# EAGLE board motorcontroller (EAGLE 8.5.0)
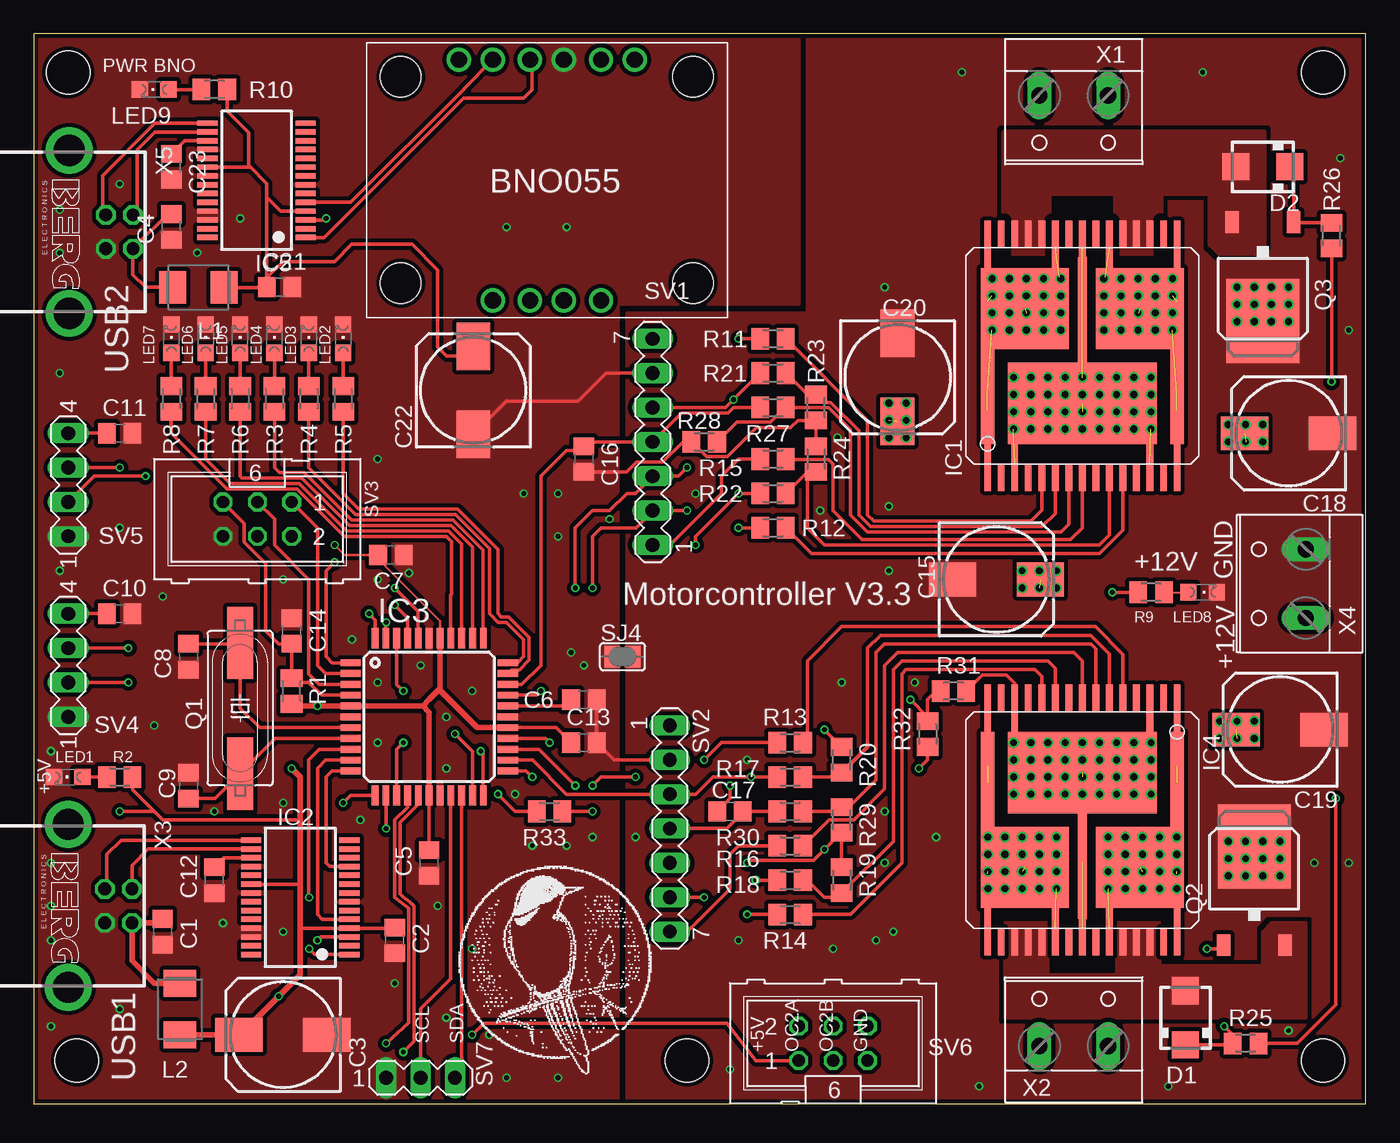
[diagram p0: board, top side]
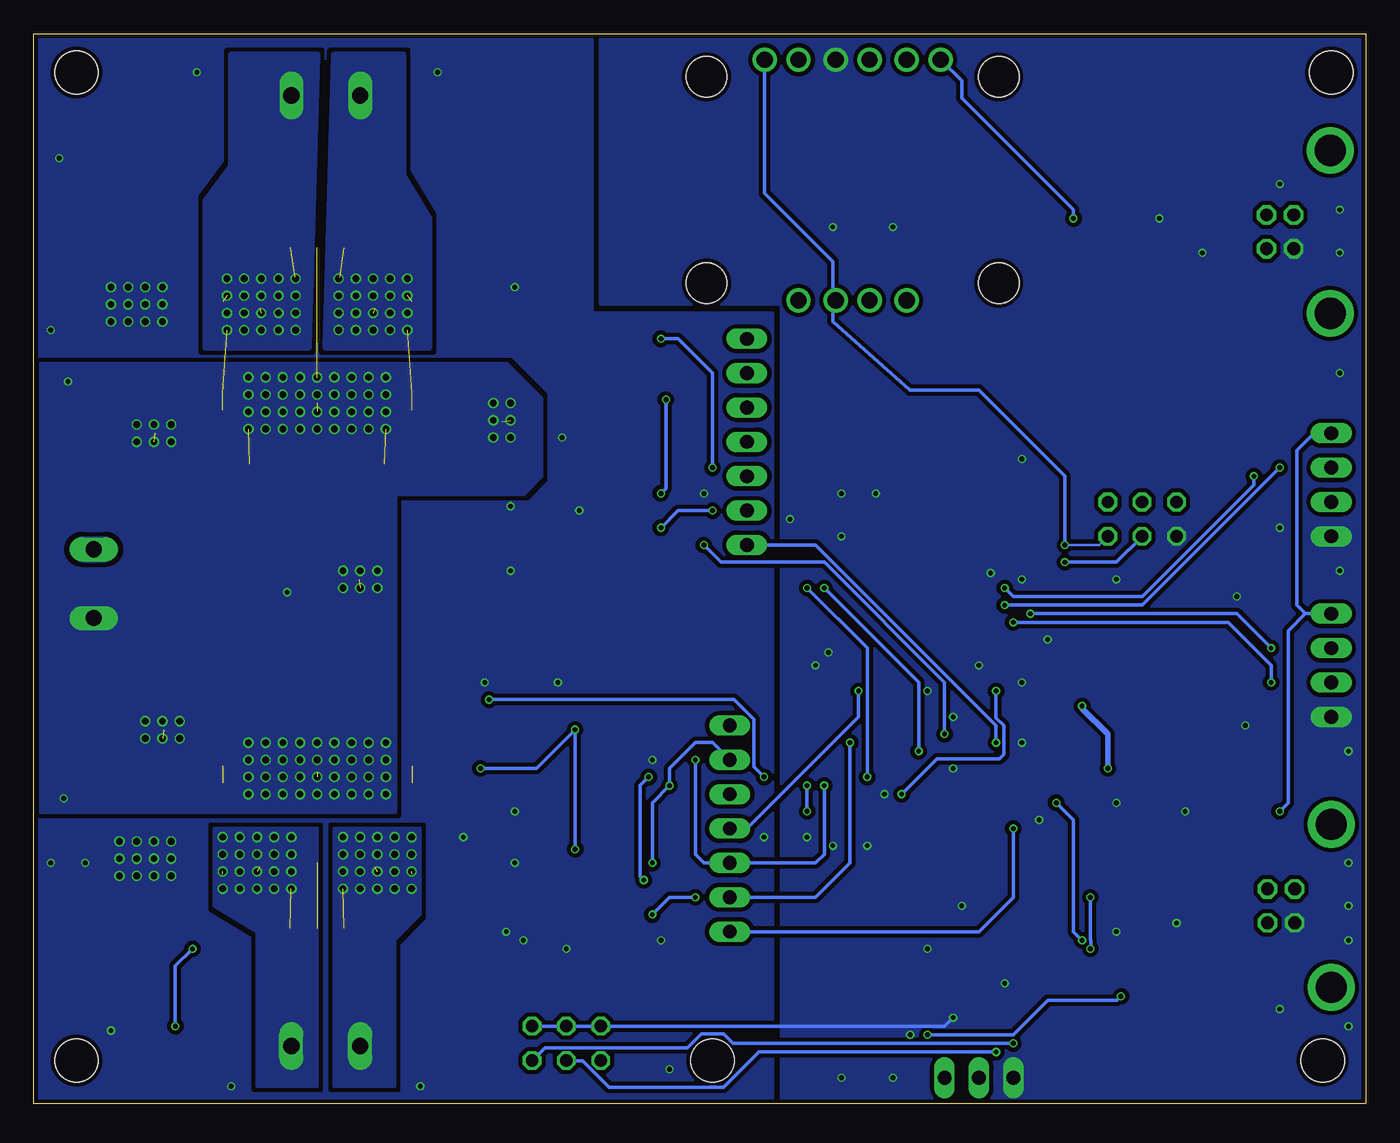
[diagram p1: board, bottom side, seen from below]

Size 98.41 x 79.05 mm. Coordinates in mm from the lower left corner, seen from the top.
Outline: 0,0 98.41,0 98.41,79.05 0,79.05 0,0
Copper layers (1*16): Top 0.018mm / dielectric 1.55mm / Bottom 0.018mm
Design rules "eC_2Layer_PClass6_BaseCopperO18_eCDefault": minimum track width 0.15mm, minimum drill 0.35mm, track to track 0.15mm, track to pad 0.15mm, pad to pad 0.15mm, via to via 0.15mm, smd to smd 0mil, copper to edge 0.25mm, drill to drill 0.35mm, minimum pad ring 0.175mm, minimum via ring 0.125mm, stop-mask expansion 0mil, vias tented up to drill 0.45mm, thermal gap 0.2mm
Holes 3.2 mm at 3.17,3.17 95.25,3.17 48.26,3.17 2.54,76.2 95.25,76.2

## Footprints (pad centres in the part's own frame; a part is rotated, then mirrored left to right if it is on the bottom)
C0805 = smd 1.3 x 1.5: 1 -0.95,0; 2 0.95,0
153CLV-0810 = smd 3.5 x 2.5: + 3.25,0; - -3.25,0
SMA = smd 2 x 2: A 2,0; C -2,0
MULTIPOWERSO-30 = smd 0.508 x 12: 1 -7,-4; 15 7,-4; 16 7,4; 30 -7,4 | smd 0.508 x 2: 2 -6,-9; 4 -4,-9; 5 -3,-9; 6 -2,-9; 7 -1,-9; 8 0,-9; 9 1,-9; 10 2,-9; 11 3,-9; 12 4,-9; 14 6,-9; 17 6,9; 18 5,9; 19 4,9; 20 3,9; 22 1,9; 24 -1,9; 26 -3,9; 27 -4,9; 28 -5,9; 29 -6,9 | smd 0.508 x 4: 3 -5,-8; 13 5,-8; 21 2,8; 23 0,8; 25 -2,8 | smd 6.5 x 6: OUTA -4.25,3.5; OUTB 4.25,3.5 | smd 1 x 7.5: OUTA@1 -7,-2.755; OUTB@1 7,-2.755 | smd 11 x 6: VCC 0,-3.5 | smd 0.65 x 8.3: VCC@1 0,3.145
SSOP28 = smd 0.4 x 1.5: 1 -4.225,-3.625; 2 -3.575,-3.625; 3 -2.925,-3.625; 4 -2.275,-3.625; 5 -1.625,-3.625; 6 -0.975,-3.625; 7 -0.325,-3.625; 8 0.325,-3.625; 9 0.975,-3.625; 10 1.625,-3.625; 11 2.275,-3.625; 12 2.925,-3.625; 13 3.575,-3.625; 14 4.225,-3.625; 15 4.225,3.625; 16 3.575,3.625; 17 2.925,3.625; 18 2.275,3.625; 19 1.625,3.625; 20 0.975,3.625; 21 0.325,3.625; 22 -0.325,3.625; 23 -0.975,3.625; 24 -1.625,3.625; 25 -2.275,3.625; 26 -2.925,3.625; 27 -3.575,3.625; 28 -4.225,3.625
TQFP44 = smd 1.5 x 0.5: 1 -5.8,4; 2 -5.8,3.2; 3 -5.8,2.4; 4 -5.8,1.6; 5 -5.8,0.8; 6 -5.8,0; 7 -5.8,-0.8; 8 -5.8,-1.6; 9 -5.8,-2.4; 10 -5.8,-3.2; 11 -5.8,-4; 23 5.8,-4; 24 5.8,-3.2; 25 5.8,-2.4; 26 5.8,-1.6; 27 5.8,-0.8; 28 5.8,0; 29 5.8,0.8; 30 5.8,1.6; 31 5.8,2.4; 32 5.8,3.2; 33 5.8,4 | smd 0.5 x 1.5: 12 -4,-5.8; 13 -3.2,-5.8; 14 -2.4,-5.8; 15 -1.6,-5.8; 16 -0.8,-5.8; 17 0,-5.8; 18 0.8,-5.8; 19 1.6,-5.8; 20 2.4,-5.8; 21 3.2,-5.8; 22 4,-5.8; 34 4,5.8; 35 3.2,5.8; 36 2.4,5.8; 37 1.6,5.8; 38 0.8,5.8; 39 0,5.8; 40 -0.8,5.8; 41 -1.6,5.8; 42 -2.4,5.8; 43 -3.2,5.8; 44 -4,5.8
L4532M = smd 2 x 2.4: 1 -1.9,0; 2 1.9,0
CHIPLED_0805 = smd 1.2 x 1.2: A 0,-1.05; C 0,1.05
HC49UP = smd 5.334 x 1.93: 1 -4.826,0; 2 4.826,0
D-PAK_TO252AA = smd 1 x 1.6: 1 -2.28,-4.8; 3 2.28,-4.8 | smd 5.4 x 6.2: 4 0,2.5
M0805 = smd 1.3 x 1.6: 1 -0.95,0; 2 0.95,0
SJ = smd 1.168 x 1.6: 1 -0.762,0; 2 0.762,0
MA07-1 = drill 1.016 long: 1 -7.62,0; 2 -5.08,0; 3 -2.54,0; 4 0,0; 5 2.54,0; 6 5.08,0; 7 7.62,0
ML6 = drill 0.914 octagon: 1 -2.54,-1.27; 2 -2.54,1.27; 3 0,-1.27; 4 0,1.27; 5 2.54,-1.27; 6 2.54,1.27
MA04-1 = drill 1.016 long: 1 -3.81,0; 2 -1.27,0; 3 1.27,0; 4 3.81,0
MA03-1 = drill 1.016 long: 1 -2.54,0; 2 0,0; 3 2.54,0
BNO055_ADA = drill 1.2: P$1 -6.5,-8.89; P$2 -4,-8.89; P$3 -1.25,-8.89; P$4 1.25,-8.89; P$5 4,-8.89; P$6 6.5,-8.89; P$7 -4,8.89; P$8 -1.25,8.89; P$9 1.25,8.89; P$10 4,8.89 | hole 3: -10.795,7.62; -10.795,-7.62; 10.795,-7.62; 10.795,7.62
W237-132 = drill 1.194 long: 1 -2.54,-0.635; 2 2.54,-0.635
PN61729-S = drill 0.95 octagon: 1 1.25,4.71; 2 -1.25,4.71; 3 -1.25,2.71; 4 1.25,2.71 | drill 2.3 pad 2.9: S1 -6.02,0; S2 6.02,0

## Placement (x,y rotation side)
C1  [C0805]  9.53,12.7 90 top
C2  100nF  [C0805]  26.67,12.06 270 top
C3  [153CLV-0810]  18.41,5.08 180 top
C4  [C0805]  10.16,64.77 90 top
C5  100nF  [C0805]  29.21,17.78 270 top
C6  100nF  [C0805]  40.64,29.84 0 top
C7  100nF  [C0805]  26.39,40.54 0 top
C8  27pF  [C0805]  11.43,33.02 270 top
C9  27pF  [C0805]  11.43,23.5 90 top
C10  100nF  [C0805]  6.35,36.2 0 top
C11  100nF  [C0805]  6.35,49.53 0 top
C12  100nF  [C0805]  13.34,16.51 270 top
C13  100nF  [C0805]  40.64,26.67 0 top
C14  100nF  [C0805]  19.05,34.92 90 top
C15  [153CLV-0810]  71.12,38.73 0 top
C16  33nF  [C0805]  40.64,47.62 270 top
C17  33nF  [C0805]  51.44,21.59 180 top
C18  [153CLV-0810]  92.71,49.53 180 top
C19  [153CLV-0810]  92.08,27.62 180 top
C20  [153CLV-0810]  63.82,53.66 270 top
C21  100nF  [C0805]  18.17,60.33 0 top
C22  [153CLV-0810]  32.47,52.7 90 top
C23  100nF  [C0805]  10.16,69.22 270 top
D1  DO214AC  [SMA]  85.09,6.35 90 top
D2  DO214AC  [SMA]  90.81,69.22 180 top
IC1  VNH3SP30  [MULTIPOWERSO-30]  77.47,55.24 0 top
IC2  FT232RL  [SSOP28]  19.68,15.24 90 top
IC3  ATMEGA644A  [TQFP44]  29.21,28.57 0 top
IC4  VNH3SP30  [MULTIPOWERSO-30]  77.47,20.95 180 top
IC5  FT232RL  [SSOP28]  16.46,68.22 90 top
L1  [L4532M]  12.17,60.3 180 top
L2  [L4532M]  10.79,6.99 90 top
LED1  [CHIPLED_0805]  2.54,24.13 90 top
LED2  [CHIPLED_0805]  22.86,56.52 0 top
LED3  [CHIPLED_0805]  20.32,56.52 0 top
LED4  [CHIPLED_0805]  17.78,56.52 0 top
LED5  [CHIPLED_0805]  15.24,56.52 0 top
LED6  [CHIPLED_0805]  12.7,56.52 0 top
LED7  [CHIPLED_0805]  10.16,56.52 0 top
LED8  [CHIPLED_0805]  86.36,37.78 270 top
LED9  [CHIPLED_0805]  8.89,74.93 90 top
Q1  [HC49UP]  15.24,29.21 90 top
Q2  IRLR 2905  [D-PAK_TO252AA]  90.17,16.51 0 top
Q3  IRLR2905  [D-PAK_TO252AA]  90.81,60.33 180 top
R1  [M0805]  19.05,30.48 270 top
R2  [M0805]  6.35,24.13 180 top
R3  [M0805]  17.78,52.07 90 top
R4  [M0805]  20.32,52.07 90 top
R5  [M0805]  22.86,52.07 90 top
R6  [M0805]  15.24,52.07 90 top
R7  [M0805]  12.7,52.07 90 top
R8  [M0805]  10.16,52.07 90 top
R9  [M0805]  82.55,37.78 0 top
R10  [M0805]  13.34,74.93 0 top
R11  [M0805]  54.61,56.52 180 top
R12  [M0805]  54.61,42.55 180 top
R13  [M0805]  55.88,26.67 180 top
R14  [M0805]  55.88,13.97 180 top
R15  [M0805]  54.61,47.62 180 top
R16  [M0805]  55.88,19.05 180 top
R17  [M0805]  55.88,24.13 180 top
R18  [M0805]  55.88,16.51 180 top
R19  [M0805]  59.69,16.51 90 top
R20  [M0805]  59.69,25.4 270 top
R21  [M0805]  54.61,53.98 180 top
R22  [M0805]  54.61,45.09 180 top
R23  [M0805]  57.78,51.44 270 top
R24  [M0805]  57.78,47.62 90 top
R25  [M0805]  89.53,4.45 0 top
R26  [M0805]  95.89,64.14 270 top
R27  10k  [M0805]  54.61,51.44 180 top
R28  1,5k  [M0805]  49.53,48.9 180 top
R29  [M0805]  59.69,20.95 270 top
R30  10k  [M0805]  55.88,21.59 180 top
R31  [M0805]  67.94,30.48 0 top
R32  [M0805]  66.04,27.3 90 top
R33  [M0805]  38.1,21.59 180 top
SJ4  [SJ]  43.5,33.02 0 top
SV1  [MA07-1]  45.72,48.9 90 top
SV2  [MA07-1]  46.99,20.32 270 top
SV3  [ML6]  16.51,43.18 180 top
SV4  [MA04-1]  2.54,32.38 90 top
SV5  [MA04-1]  2.54,45.72 90 top
SV6  [ML6]  59.05,4.45 0 top
SV7  [MA03-1]  28.57,1.91 0 top
U$1  BNO055  [BNO055_ADA]  37.91,68.24 180 top
X1  [W237-132]  76.83,73.86 180 top
X2  [W237-132]  76.83,4.88 0 top
X3  PN61729-S  [PN61729-S]  2.54,14.61 270 top
X4  [W237-132]  93.34,38.42 90 top
X5  PN61729-S  [PN61729-S]  2.61,64.41 270 top

## Library data of the parts
C1-C23 R1-R33 = rcl
D1 D2 = diode
IC1 IC4 = st-microelectronics
IC2 IC5 = ftdichip; MPN: FT232RL; OC_FARNELL: 1146032; OC_NEWARK: 91K9918
IC3 = atmel; MPN: ATMEGA644PV-10AU; OC_FARNELL: 1455123; OC_NEWARK: 58M3748
L1 L2 = eagle-ltspice; SPICEMODEL: NONE; SPICEPREFIX: L
LED1-LED9 = led
Q1 = crystal; OC_FARNELL: unknown; OC_NEWARK: unknown
Q2 Q3 = transistor-power
SJ4 = jumper
SV1 SV2 SV4 SV5 SV7 = con-lstb; OC_FARNELL: unknown; OC_NEWARK: unknown
SV3 SV6 = con-harting-ml; OC_FARNELL: unknown; OC_NEWARK: unknown
U$1 = bno055_adafruit
X1 X2 X4 = con-wago-508; OC_FARNELL: unknown; OC_NEWARK: unknown
X3 X5 = con-berg; OC_FARNELL: unknown; OC_NEWARK: unknown

## Nets
+5V: C2.1 C3.+ C5.1 C7.1 C10.1 C11.1 C13.1 IC2.4 IC2.20 IC3.5 IC3.17 IC3.27 IC3.38 L2.1 R1.2 R2.1 SV3.2 SV4.4 SV5.4 SV6.1 U$1.P$1 U$1.P$8
+12V: C15.+ C18.+ C19.+ C20.+ IC1.3 IC1.13 IC1.23 IC1.VCC IC1.VCC@1 IC4.3 IC4.13 IC4.23 IC4.VCC IC4.VCC@1 R9.1 R25.2 R26.2 R31.2 X4.1
A_1: IC3.44 SV4.3
A_2: IC3.41 SV5.3
B_1: IC3.43 SV4.2
B_2: IC3.40 SV5.2
CS_1: C16.1 IC3.31 R27.2 SV1.4
CS_2: C17.1 IC3.30 R30.2 SV2.4
CTS: IC2.11 IC3.11
EN_1: IC3.21 R21.2 R22.2 SV1.5
EN_2: IC3.24 R17.2 R18.2 SV2.3
GND: C1.1 C2.2 C3.- C4.1 C5.2 C6.2 C7.2 C8.2 C9.2 C10.2 C11.2 C12.2 C13.2 C14.2 C16.2 C17.2 C21.2 C22.- C23.2 IC2.7 IC2.18 IC2.21 IC2.25 IC2.26 IC3.6 IC3.18 IC3.28 IC3.39 IC5.7 IC5.18 IC5.21 IC5.25 IC5.26 LED1.C LED2.C LED3.C LED4.C LED5.C LED6.C LED7.C LED9.C R19.2 R20.1 R23.2 R24.2 R28.2 R29.2 R32.1 SJ4.1 SV1.6 SV2.2 SV3.6 SV4.1 SV5.1 SV6.2 SV6.4 SV6.6 SV7.1 U$1.P$3 X3.4 X5.4
GNDA: C15.- C18.- C19.- C20.- LED8.C Q2.4 Q3.4 SJ4.2 X4.2
INA_1: IC3.22 R11.2 SV1.3
INA_2: IC3.25 R13.2 SV2.5
INB_1: IC3.23 R12.2 SV1.2
INB_2: IC3.26 R14.2 SV2.6
LED2: IC3.32 R5.1
LED3: IC3.33 R4.1
LED4: IC3.34 R3.1
LED5: IC3.35 R6.1
LED6: IC3.36 R7.1
LED7: IC3.37 R8.1
MISO: IC3.2 SV3.1
MOSI: IC3.1 SV3.4
N$1: SV1.7
N$2: LED1.A R2.2
N$3: IC2.16 X3.2
N$4: IC2.15 X3.3
N$5: LED4.A R3.2
N$6: LED3.A R4.2
N$7: C8.1 IC3.7 Q1.2
N$8: C9.1 IC3.8 Q1.1
N$9: LED2.A R5.2
N$10: C6.1 IC3.29
N$11: LED5.A R6.2
N$12: LED6.A R7.2
N$13: LED7.A R8.2
N$14: C1.2 L2.2 X3.1
N$15: LED8.A R9.2
N$16: LED9.A R10.1
N$17: C12.1 IC2.17
N$18: IC4.5 R13.1
N$19: IC5.16 X5.2
N$20: IC4.11 R14.1
N$21: IC4.8 R16.1
N$22: IC1.5 R11.1
N$23: IC1.11 R12.1
N$24: IC1.8 R15.1
N$25: IC4.6 R17.1 R20.2
N$26: IC4.10 R18.1 R19.1
N$27: D2.A IC1.18 IC1.19 IC1.20 IC1.26 IC1.27 IC1.28 Q3.3
N$28: IC1.6 R21.1 R23.1
N$29: IC1.10 R22.1 R24.1
N$30: D1.A IC4.18 IC4.19 IC4.20 IC4.26 IC4.27 IC4.28 Q2.3
N$31: D1.C Q2.1 R25.1
N$32: D2.C Q3.1 R26.1
N$33: IC4.1 IC4.25 IC4.30 IC4.OUTA IC4.OUTA@1 X2.2
N$34: IC4.15 IC4.16 IC4.21 IC4.OUTB IC4.OUTB@1 X2.1
N$35: IC1.15 IC1.16 IC1.21 IC1.OUTB IC1.OUTB@1 X1.1
N$36: IC1.1 IC1.25 IC1.30 IC1.OUTA IC1.OUTA@1 X1.2
N$37: IC1.7 R27.1 R28.1
N$38: IC4.7 R29.1 R30.1
N$39: IC5.15 X5.3
N$40: C4.2 L1.2 X5.1
N$41: C23.1 IC5.17
N$42: C21.1 C22.+ IC5.4 IC5.20 L1.1 R10.2
N$43: IC3.16 SV6.3
N$44: IC3.15 SV6.5
N$45: R31.1 R32.2 R33.1
N$46: IC3.42 R33.2
PWM_1: IC3.14 R15.2 SV1.1
PWM_2: IC3.13 R16.2 SV2.7
RESET: C14.1 IC3.4 R1.1 SV3.5
RST: IC5.3 U$1.P$6
RTS: IC2.3 IC3.12
RX: IC2.1 IC3.9
RX_1: IC5.1 U$1.P$4
SCK: IC3.3 SV3.3
SCL: IC3.19 SV7.2
SDA: IC3.20 SV7.3
TX: IC2.5 IC3.10
TX_1: IC5.5 U$1.P$5

## Tracks (layer width: path | path; a pad name or v marks a point on that pad's centre or on a via)
+5V  (via drill 0.35)
  Top 0.2: 25.67,40.01 25.67,39.9 | 25.67,40.01 25.67,40.31 C7.1 22.96,40.54 v22.23,41.27 | 25.67,40.01 30.01,35.67 IC3.38
  Top 0.254: 19.68,13 19.72,12.96 IC2.4 26.62,12.96 C2.1 | IC2.20 19.65,16.21 19.68,16.25 | R2.1 7.3,23.18 8.89,21.59 | 8.89,21.59 9.53,20.95 19.59,20.95 19.68,20.86 | 19.2,29.38 R1.2 | IC3.27 38.59,27.77 C13.1 | C5.1 IC3.17 | SV5.4 C11.1 | C10.1 SV4.4 | v6.35,21.59 8.89,21.59 | 29.95,30.58 30.01,30.64 | 29.21,29.85 29.21,29.84 | 28.75,29.38 28.74,29.38 | SV6.1 53.34,3.17 51.2,5.95 33.25,5.95 v32.38,5.08
  Top 0.406: L2.1 C3.+ 15.24,5.08 v18.08,7.92 19.68,9.53 19.68,13 19.68,16.25 19.68,20.86 19.68,24.13 v19.05,24.77 | 19.2,29.38 v20.95,29.38 IC3.5 28.74,29.38 | 30.01,30.64 IC3.38 | IC3.27 32.76,27.77 29.95,30.58 29.21,29.85 28.75,29.38 29.21,28.91 IC3.17
  Bottom 0.2: v22.23,41.27 19.68,41.27 SV3.2
  Bottom 0.254: 4.45,36.2 SV4.4 | 4.45,36.2 5.71,34.92 5.71,22.23 v6.35,21.59 | SV5.4 3.81,49.53 5.08,48.26 5.08,36.83 4.45,36.2 | v22.23,41.27 22.23,46.35 28.57,52.7 33.66,52.7 39.37,57.78 39.37,59.14 39.32,59.19 | 39.32,59.19 U$1.P$8 | U$1.P$1 44.41,67.27 39.37,62.23 39.37,59.23 39.32,59.19 | v32.38,5.08 26.04,5.08 23.5,7.62 18.39,7.62 v18.08,7.92
  Bottom 0.406: v19.05,24.77 19.05,27.3 20.95,29.21 v20.95,29.38
+12V  (via drill 0.35, 0.5)  (11 unrouted)
  Top 0.152: IC4.3 82.47,26.75 v82.55,26.67 | IC4.13 72.47,26.75 v72.39,26.67 | IC4.23 v77.47,22.86
  Top 0.254: v79.69,37.78 R9.1 | R25.2 93.34,4.45 96.2,7.3 v96.2,22.54 | R26.2 v95.89,53.34 | IC4.13 72.47,31.04 71.84,31.66 70.08,31.66 R31.2
  other vias: 82.55,25.4 82.55,24.13 82.55,22.86 77.47,26.67 77.47,25.4 77.47,24.13 81.28,26.67 81.28,25.4 81.28,24.13 81.28,22.86 80.01,26.67 80.01,25.4 80.01,24.13 80.01,22.86 78.74,26.67 78.74,25.4 78.74,24.13 78.74,22.86 76.2,26.67 76.2,25.4 76.2,24.13 76.2,22.86 74.93,26.67 74.93,25.4 74.93,24.13 74.93,22.86 73.66,26.67 73.66,25.4 73.66,24.13 73.66,22.86 72.39,25.4 72.39,24.13 72.39,22.86 90.17,28.26 88.9,28.26 87.63,28.26 87.63,26.99 88.9,26.99 90.17,26.99 75.56,39.37 74.3,39.37 73.03,39.37 73.03,38.1 74.3,38.1 75.56,38.1 82.55,53.66 82.55,52.39 82.55,51.12 82.55,49.85 77.47,53.66 77.47,52.39 77.47,51.12 77.47,49.85 81.28,53.66 81.28,52.39 81.28,51.12 81.28,49.85 80.01,53.66 80.01,52.39 80.01,51.12 80.01,49.85 78.74,53.66 78.74,52.39 78.74,51.12 78.74,49.85 76.2,53.66 76.2,52.39 76.2,51.12 76.2,49.85 74.93,53.66 74.93,52.39 74.93,51.12 74.93,49.85 73.66,53.66 73.66,52.39 73.66,51.12 73.66,49.85 72.39,53.66 72.39,52.39 72.39,51.12 72.39,49.85 63.18,51.75 63.18,50.48 63.18,49.21 64.45,49.21 64.45,50.48 64.45,51.75 90.81,50.16 89.53,50.16 88.27,50.16 88.27,48.9 89.53,48.9 90.81,48.9
  pour Bottom (isolate 0.406, no thermals): 99.06,54.61 63.5,54.61 60.96,52.07 60.96,46.35 62.23,45.09 71.75,45.09 71.75,21.59 99.06,21.59
A_1  (via drill 0.35)
  Top 0.254: IC3.44 25.21,35.75 v24.77,36.2 | v6.99,33.66 SV4.3
  Bottom 0.254: v24.77,36.2 9.53,36.2 v6.99,33.66
A_2  (via drill 0.35)
  Top 0.254: IC3.41 27.61,35.89 v26.67,36.83 | v6.35,46.99 SV5.3
  Bottom 0.254: v26.67,36.83 16.51,36.83 v6.35,46.99
B_1  (via drill 0.35)
  Top 0.254: IC3.43 26.01,35.53 v26.04,35.56 | v6.99,31.11 SV4.2
  Bottom 0.254: v26.04,35.56 10.16,35.56 6.99,32.38 v6.99,31.11
B_2  (via drill 0.35)
  Top 0.254: IC3.40 28.41,36.36 v26.67,38.1 | v8.26,46.35 4.45,46.35 SV5.2
  Bottom 0.254: v26.67,38.1 26.04,37.47 16.51,37.47 8.26,45.72 v8.26,46.35
CS_1
  Top 0.254: IC3.31 36.05,30.98 37.47,32.38 37.47,46.35 39.37,48.26 40.33,48.26 C16.1 40.96,48.9 SV1.4 47.86,51.03 51.29,51.03 51.69,51.44 R27.2
CS_2  (via drill 0.35)
  Top 0.254: 52.49,21.59 R30.2 | 52.49,21.59 C17.1 | SV2.4 51.23,20.32 52.49,21.59 | IC3.30 37.16,30.18 v37.47,30.48
  Bottom 0.254: v37.47,30.48 37.47,28.57 45.72,20.32 SV2.4
CTS
  Top 0.254: IC3.11 22.04,24.57 21.59,24.13 21.59,18.59 | 21.59,18.59 21.59,18.41 | IC2.11 21.86,17.52 21.59,17.78 21.59,18.59
EN_1  (via drill 0.35)
  Top 0.254: SV1.5 51.12,51.44 v51.7,52.02 R21.2 | R22.2 v52.07,45.09 48.9,41.91 v48.9,41.27 | IC3.21 32.41,26.01 v31.11,27.3
  Bottom 0.254: v51.7,52.02 51.7,45.45 v52.07,45.09 | v31.11,27.3 31.11,31.11 40.01,40.01 47.62,40.01 v48.9,41.27
EN_2  (via drill 0.35)
  Top 0.254: R17.2 v52.98,24.13 50.16,24.13 48.9,22.86 SV2.3 39.37,22.86 36.85,25.38 IC3.24 | v53.34,16.51 R18.2
  Bottom 0.254: v53.34,16.51 53.62,16.79 53.62,23.5 v52.98,24.13
GND  (via drill 0.35)
  Top 0.254: R24.2 R23.2 56.45,50.48 55.92,49.95 53.38,49.95 51.24,47.82 49.72,47.82 48.64,48.9 R28.2 47.95,48.9 46.45,47.39 44.53,47.39 43.81,46.67 C16.2 | R19.2 R29.2 59.63,20 v58.41,18.79 57.59,17.97 52.9,17.97 v52.7,17.78 | v51.44,23.5 51.44,22.54 C17.2 | SV2.2 42.86,25.4 C13.2 C6.2 | v58.42,27.62 59.05,26.99 R20.1 | SV1.6 42.26,53.98 40.2,51.92 34.94,51.92 C22.- | R32.1 66.04,25.4 v65.41,24.77
  Bottom 0.254: v52.7,17.78 52.7,22.23 v51.44,23.5 51.44,24.77 49.53,26.67 48.26,26.67 SV2.2 | v58.41,18.79 58.41,26.98 v58.42,27.62 61.28,24.77 v65.41,24.77 | SV6.6 SV6.4 SV6.2 31.11,5.71 v30.48,6.35
  other vias: 18.41,12.7 13.97,13.34 6.35,6.99 8.89,27.94 25.4,26.67 25.4,31.11 30.48,28.57 40.64,32.38 39.69,33.34 38.73,41.91 38.73,45.09 36.2,45.09 27.71,39.2 25.4,38.73 25.4,47.62 6.35,42.55 9.53,37.47 18.41,38.73 23.5,34.29 35.56,22.86 26.67,8.89 29.84,14.61 24.13,20.95 39.37,19.05 18.41,22.23 13.34,21.59 34.92,64.77 39.37,64.77 12.06,62.87 15.24,65.41 6.35,67.94 32.38,11.43 28.57,32.38 41.27,19.68 36.83,19.05 30.48,24.77 42.55,43.18 32.38,30.48 34.92,1.91 38.73,1.91 33.66,5.08 1.91,66.04 1.91,62.87 1.91,53.98 1.91,39.37 1.27,26.04 1.27,17.78 1.27,14.61 1.27,12.06 1.27,5.71
  pour Top (isolate 0.305, no thermals): -0.64,92.71 56.52,92.71 56.52,59.05 43.18,59.05 43.18,-0.64 -0.55,-0.71 -0.64,57.78
  pour Bottom (isolate 0.305, no thermals): -0.64,92.71 56.52,92.71 56.52,59.05 43.18,59.05 43.18,-1.27 -0.57,-1.39 -0.64,58.42
GNDA  (via drill 0.35, 0.5)
  other vias: 88.27,19.37 88.27,18.1 88.27,16.83 48.9,45.09 89.53,19.37 89.53,18.1 89.53,16.83 90.81,19.37 90.81,18.1 90.81,16.83 92.08,19.37 92.08,18.1 92.08,16.83 59.69,31.11 66.67,19.68 63.18,44.13 62.87,60.33 97.16,57.15 96.52,69.85 97.16,17.78 94.61,17.78 83.82,1.27 69.85,1.27 68.58,76.2 86.36,76.2 63.18,39.37 92.71,5.4 88.9,60.33 88.9,59.05 88.9,57.78 90.17,60.33 90.17,59.05 90.17,57.78 91.44,60.33 91.44,59.05 91.44,57.78 92.71,60.33 92.71,59.05 92.71,57.78 63.5,12.7 52.07,12.06 51.44,2.54 62.23,12.06 59.05,11.43 65.09,31.11 62.87,21.59 62.87,17.78 52.7,25.4 58.1,43.81 59.37,49.21 44.45,19.68
  pour Bottom (isolate 0.305, rank 4, no thermals): 57.15,92.71 100.33,92.71 100.33,57.15 99.69,-1.27 43.81,-1.27 43.81,58.42 57.15,58.42
  pour Top (isolate 0.305, rank 4, no thermals): 57.15,92.71 100.33,92.71 100.33,-1.91 43.81,-1.91 43.81,58.42 57.15,58.42
INA_1  (via drill 0.35)
  Top 0.254: v48.26,46.99 47.62,46.35 SV1.3 44.45,45.09 43.81,45.09 42.55,43.81 41.27,43.81 40.01,42.55 v40.01,38.1 | R11.2 v52.07,56.52 | IC3.22 33.21,25.84 v33.02,26.04
  Bottom 0.254: v48.26,46.99 48.26,53.98 50.8,56.52 v52.07,56.52 | v33.02,26.04 33.02,31.11 v40.01,38.1
INA_2  (via drill 0.35)
  Top 0.254: R13.2 50.8,26.67 v49.53,25.4 | IC3.25 37.33,26.18 v40.01,23.5
  Bottom 0.254: v49.53,25.4 49.53,18.41 48.9,17.78 47.03,17.78 SV2.5 40.64,17.78 40.01,18.41 v40.01,23.5
INB_1  (via drill 0.35)
  Top 0.254: 45.77,43.81 SV1.2 | 45.77,43.81 v48.26,43.81 | R12.2 v52.07,42.55 | IC3.23 36.38,24.57 v36.83,24.13 | v41.27,38.1 41.27,41.91 41.91,42.55 44.5,42.55 45.77,43.81
  Bottom 0.254: v48.26,43.81 50.8,43.81 v52.07,42.55 | v36.83,24.13 36.83,33.66 v41.27,38.1
INB_2  (via drill 0.35)
  Top 0.254: SV2.6 v49.53,15.24 | R14.2 v52.7,13.97 | IC3.26 37.8,26.98 v38.1,26.67
  Bottom 0.254: v49.53,15.24 51.44,15.24 v52.7,13.97 | v38.1,26.67 38.1,17.78 40.64,15.24 SV2.6
LED2
  Top 0.254: IC3.32 35.28,32.05 35.88,32.05 36.6,32.77 36.6,34.46 35.09,35.96 34.52,35.96 34.29,36.2 34.29,40.96 31.32,43.93 24.02,43.93 22.86,45.09 R5.1
LED3
  Top 0.254: IC3.33 35.75,32.58 36.2,33.02 36.2,34.29 34.92,35.56 34.29,35.56 33.66,36.2 33.66,41.02 31.15,43.53 23.78,43.53 20.32,46.99 R4.1
LED4
  Top 0.254: IC3.34 33.21,40.89 30.98,43.12 23.49,43.12 19.99,46.62 18.14,46.62 17.78,46.99 R3.1
LED5
  Top 0.254: IC3.35 32.41,41.12 30.82,42.72 23.32,42.72 20.95,45.09 20.92,45.09 19.78,46.22 15.37,46.22 15.24,46.35 R6.1
LED6
  Top 0.254: IC3.36 31.61,41.35 30.65,42.31 23.12,42.31 19.62,45.82 14.51,45.82 12.7,47.62 R7.1
LED7
  Top 0.254: IC3.37 30.81,37.59 30.87,37.66 30.87,41.52 30.48,41.91 22.95,41.91 19.45,45.41 14.28,45.41 10.16,49.53 R8.1
MISO
  Top 0.254: IC3.2 21.57,31.77 20.95,32.38 20.95,42.55 SV3.1
MOSI  (via drill 0.35)
  Top 0.254: IC3.1 22.04,32.58 21.59,33.02 21.59,39.37 v22.23,40.01
  Bottom 0.254: v22.23,40.01 18.41,40.01 SV3.4
N$2
  Top 0.254: R2.2 LED1.A
N$3
  Top 0.254: IC2.16 8.46,18.82 7.25,17.6 X3.2
N$4
  Top 0.254: IC2.15 6.45,19.46 5.4,18.41 5.4,16 X3.3
N$5
  Top 0.254: LED4.A R3.2
N$6
  Top 0.254: LED3.A R4.2
N$7
  Top 0.254: 15.17,33.97 C8.1 | 15.17,33.97 Q1.2 | IC3.7 16.68,27.77 15.24,29.21 15.24,33.9 15.17,33.97
N$8
  Top 0.254: C9.1 13.4,22.55 15.09,24.24 | 15.09,24.24 Q1.1 | IC3.8 17.83,26.98 15.09,24.24
N$9
  Top 0.254: LED2.A R5.2
N$10
  Top 0.254: IC3.29 39.52,29.38 39.52,29.68 C6.1
N$11
  Top 0.254: LED5.A R6.2
N$12
  Top 0.254: LED6.A R7.2
N$13
  Top 0.254: LED7.A R8.2
N$14
  Top 0.305: 9.23,13.36 C1.2 | L2.2
  Top 0.406: 9.23,13.36 X3.1 7.25,10.53 8.89,8.89 L2.2
N$15
  Top 0.152: R9.2 LED8.A
N$16
  Top 0.254: R10.1 LED9.A
N$17
  Top 0.254: IC2.17 14.04,18.16 C12.1
N$18
  Top 0.254: IC4.5 80.47,33.2 78.42,35.24 59.69,35.24 57.15,32.7 57.15,26.99
  Top 0.305: 57.15,26.99 R13.1
N$19
  Top 0.254: IC5.16 8.93,71.79 7.62,70.48 7.62,65.96 X5.2
N$20
  Top 0.254: IC4.11 74.47,31.57 73.98,32.07 64.45,32.07 64.14,31.75 64.14,17.78 60.33,13.97 R14.1
N$21
  Top 0.254: IC4.8 77.47,32.7 76.83,33.34 63.82,33.34 62.87,32.38 62.87,23.24 60.6,20.98 58.76,20.98 R16.1
N$22
  Top 0.254: R11.1 61.59,50.48 61.59,43.5 62.06,43.03 73.65,43.03 74.47,43.85 IC1.5
N$23
  Top 0.254: IC1.11 80.47,42.37 78.74,40.64 57.47,40.64 R12.1
N$24
  Top 0.254: IC1.8 77.47,42.55 76.6,41.68 61.19,41.68 59.05,43.81 59.05,47.25 58.7,47.6 55.58,47.6 R15.1
N$25
  Top 0.254: R17.1 59.37,24.13 59.52,24.28 R20.2 | IC4.6 79.47,33.23 78.1,34.6 62.54,34.6 61.59,33.66 61.59,26.36
  Top 0.305: 61.59,26.36 59.52,24.28
N$26
  Top 0.254: R18.1 57.15,16.51 58.42,15.24 59.37,15.24 R19.1 63.5,19.37 63.5,32.07 64.14,32.7 74.93,32.7 75.47,32.16 IC4.10
N$27
  pour Top (isolate 0.51, no thermals): 71.75,62.87 71.75,71.75 90.81,71.75 90.81,63.5 90.17,62.87 87.63,62.87 87,63.5 87,67.31 83.19,67.31 83.19,62.87 80.01,62.87 80.01,67.31 74.93,67.31 74.93,62.87
N$28
  Top 0.254: R23.1 58.35,51.82 58.87,51.82 60.96,49.72 60.96,43.5 61.83,42.63 74.49,42.63 75.47,43.61 75.47,43.72 75.47,43.81 IC1.6 | R23.1 57.15,52.38 R21.1 | 58.42,52.7 58.1,52.7 R23.1
N$29
  Top 0.254: 57.71,46.67 R24.1 57.15,46.04 57.15,42.55 58.42,41.27 78.74,41.27 79.47,42.01 IC1.10 | 57.71,46.67 57.15,46.67 R22.1 | 58.02,46.99 57.71,46.67
N$30
  pour Top (isolate 0.305, no thermals): 83.19,13.34 83.19,10.16 90.81,10.16 90.81,12.7 91.44,13.34 93.98,13.34 93.98,6.35 71.75,6.35 71.75,13.34 74.93,13.34 74.93,9.53 80.01,9.53 80.01,13.34
N$31  (via drill 0.35)
  Top 0.254: D1.C 88.49,4.35 R25.1 88.58,5.08 v87.95,5.71 | v86.68,11.43 87.61,11.43 Q2.1
  Bottom 0.254: v87.95,5.71 87.95,10.16 v86.68,11.43
N$32
  Top 0.254: Q3.1 | Q3.1 93.08,68.94 D2.C 93.12,68.89 | R26.1 93.13,65.08 Q3.1
N$33  (via drill 0.5)  (4 unrouted)
  Top 0.254: IC4.OUTA 81.59,17.45 | 84.47,20.97 84.47,19.7 v84.45,19.68
  Top 0.61: IC4.1 84.47,20.97
  other vias: 84.45,18.41 84.45,17.14 84.45,15.88 83.19,19.68 83.19,18.41 83.19,17.14 83.19,15.88 81.92,19.68 81.92,18.41 81.92,17.14 81.92,15.88 80.64,19.68 80.64,18.41 80.64,17.14 80.64,15.88 79.38,15.88 79.38,17.14 79.38,18.41 79.38,19.68
  pour Bottom (isolate 0.305, no thermals): 85.09,20.32 85.09,14.61 81.92,12.7 81.92,1.27 77.47,1.27 77.47,20.32
N$34  (via drill 0.5)  (4 unrouted)
  Top 0.152: IC4.15 70.47,19.7 v70.48,19.68
  other vias: 70.48,18.41 70.48,17.14 70.48,15.88 75.56,19.68 75.56,18.41 75.56,17.14 75.56,15.88 74.3,19.68 74.3,18.41 74.3,17.14 74.3,15.88 73.03,19.68 73.03,18.41 73.03,17.14 73.03,15.88 71.75,19.68 71.75,18.41 71.75,17.14 71.75,15.88
  pour Bottom (isolate 0.305, no thermals): 76.2,20.32 76.2,1.27 71.75,1.27 71.75,12.06 69.85,13.97 69.85,20.32
N$35  (via drill 0.5)  (5 unrouted)
  Top 0.254: 79.15,61.05 v79.06,60.96
  other vias: 79.06,57.15 79.06,58.42 79.06,59.69 80.33,57.15 80.33,58.42 80.33,59.69 80.33,60.96 81.6,57.15 81.6,58.42 81.6,59.69 81.6,60.96 82.87,57.15 82.87,58.42 82.87,59.69 82.87,60.96 84.14,57.15 84.14,58.42 84.14,59.69 84.14,60.96
  pour Bottom (no thermals): 78.11,55.88 77.47,77.47 83.82,77.47 83.82,69.22 85.72,66.67 85.72,55.88
N$36  (via drill 0.5)  (5 unrouted)
  Top 0.254: 75.79,61.05 v75.88,60.96
  other vias: 70.8,57.15 70.8,58.42 70.8,59.69 70.8,60.96 72.07,60.96 72.07,59.69 72.07,58.42 72.07,57.15 73.34,60.96 73.34,59.69 73.34,58.42 73.34,57.15 74.61,57.15 74.61,58.42 74.61,59.69 74.61,60.96 75.88,57.15 75.88,58.42 75.88,59.69
  pour Bottom (no thermals): 76.83,55.88 69.22,55.88 69.22,65.41 71.12,68.58 71.12,77.47 76.2,77.47
N$37
  Top 0.254: R28.1 51.94,50.36 54.42,50.36 55.5,51.44 R27.1 55.58,51.41 58.7,51.41 60.33,49.79 60.33,43.5 61.59,42.23 75.88,42.23 76.47,42.81 IC1.7
N$38
  Top 0.254: R30.1 59.38,21.59 59.64,21.86 | 59.64,21.86 R29.1 | 59.64,21.86 59.91,21.59 62.23,23.91 62.23,33.34 62.86,33.96 78.1,33.96 78.47,33.59 IC4.7
N$39
  Top 0.254: IC5.15 8.94,72.44 5.08,68.58 5.08,65.9 X5.3
N$40
  Top 0.254: L1.2 10.24,60.33 8.26,60.33 7.32,61.26 X5.1 9.88,65.72 C4.2
N$41
  Top 0.254: C23.1 11.14,71.14 IC5.17
N$42
  Top 0.254: L1.1 17.18,60.3 C21.1 | 17.22,66.97 C21.1 | 17.22,66.97 17.22,67.98 16,69.19 | IC5.4 18.24,65.94 17.22,66.97 | IC5.20 16,69.19 | C21.1 17.22,61.03 18.41,62.23 22.23,62.23 23.5,63.5 27.94,63.5 29.84,61.59 29.84,55.88 30.48,55.24 32.38,55.24 32.38,55.87 C22.+ | 16,69.19 15.88,69.32 15.88,71.75 14.29,73.34 R10.2
N$43  (via drill 0.35)
  Top 0.254: IC3.16 28.41,22.12 27.07,20.79 27.07,15.49 27.31,15.25 27.75,14.91 27.78,14.91 27.88,14.8 27.99,14.72 27.99,14.69 28.1,14.58 28.1,6.11 28.11,6.11 28.1,5.95 28.1,4.61 v27.3,3.81
  Bottom 0.254: v27.3,3.81 44.83,3.81 47.44,1.2 55.9,1.2 57.88,3.17 SV6.3
N$44  (via drill 0.35)
  Top 0.254: IC3.15 27.61,21.89 26.67,20.95 26.67,15.24 27.61,14.5 27.7,14.41 27.7,5.96 v26.04,4.45
  Bottom 0.254: SV6.5 60.63,4.14 50.09,4.14 49.08,5.15 47.44,5.15 46.73,4.45 v26.04,4.45
N$45  (via drill 0.35)
  Top 0.254: R31.1 66.67,30.48 66.04,29.84 R32.2 66.04,28.57 v64.77,29.84 | v44.45,24.13 41.91,24.13 v41.27,23.5 | v41.27,21.59 R33.1
  Bottom 0.254: v44.45,24.13 45.19,24.87 45.19,28.37 46.66,29.84 v64.77,29.84 | v41.27,23.5 v41.27,21.59
N$46  (via drill 0.35)
  Top 0.254: IC3.42 26.81,30.98 v27.3,30.48 | v34.29,22.86 35.56,21.59 R33.2
  Bottom 0.254: v34.29,22.86 31.69,25.46 27.07,25.46 26.73,25.8 26.73,27.93 27.3,28.51 v27.3,30.48
PWM_1  (via drill 0.35)
  Top 0.254: SV1.1 46.99,41.27 50.8,45.09 50.8,46.35 52.07,47.62 R15.2 | IC3.14 26.81,26.18 v27.3,26.67
  Bottom 0.254: v27.3,26.67 27.3,27.94 40.64,41.27 SV1.1
PWM_2  (via drill 0.35)
  Top 0.254: SV2.7 48.26,12.7 51.44,15.88 51.44,18.41 52.07,19.05 R16.2 | v26.04,20.32 26.04,22.75 IC3.13
  Bottom 0.254: SV2.7 28.57,12.7 26.04,15.24 v26.04,20.32
RESET
  Top 0.254: IC3.4 21.26,30.18 20.32,31.11 19.36,31.11 R1.1 C14.1 18.09,33.98 17.14,34.92 17.14,39.91 15.55,41.51 15.55,42.87 SV3.5
RST  (via drill 0.35)
  Top 0.254: IC5.3 21.48,65.29 v21.59,65.41
  Bottom 0.254: v21.59,65.41 21.59,66.04 29.84,74.3 29.84,75.57 U$1.P$6
RTS  (via drill 0.35)
  Top 0.254: IC3.12 23.41,22.77 v22.86,22.23 | IC2.3 21.2,12.31 v20.95,12.06
  Bottom 0.254: v22.86,22.23 21.59,20.95 21.59,12.7 v20.95,12.06
RX  (via drill 0.35)
  Top 0.254: IC3.9 21.09,26.18 20.32,25.4 20.32,15.24 v20.34,15.24 | IC2.1 20.75,11.02 v20.34,11.43
  Bottom 0.254: v20.34,15.24 20.34,12.08 20.32,12.06 20.32,11.45 v20.34,11.43
RX_1
  Top 0.254: IC5.1 21.45,63.99 31.75,74.3 36.2,74.3 36.83,74.93 36.83,76.96 U$1.P$4
SCK
  Top 0.254: IC3.3 21.09,30.98 20.32,31.75 20.32,38.73 17.78,41.27 17.78,43.18 SV3.3
SCL
  Top 0.254: IC3.19 30.81,9.22 28.57,6.99 SV7.2
SDA
  Top 0.254: IC3.20 31.61,2.4 SV7.3
TX
  Top 0.254: IC3.10 21.57,25.38 20.95,24.77 20.95,13.97 21.31,13.62 IC2.5
TX_1
  Top 0.254: IC5.5 23.41,66.59 31.75,74.93 31.75,74.97 U$1.P$5

## Text on the board
tNames: PWR BNO | BNO055 | USB2 | +12V | GND | Motorcontroller V3.3 | +12V | +5V | USB1 | SCL | SDA | +5V | OC2A | OC2B | GND
200bmp: /home/firesurfer/Bilder/bmp.bmp